# Altium PCB DB_PCB.PcbDoc
Units mm, origin at the board's own origin, x right, y up, seen from the top; angles counter-clockwise.
Board outline 90 x 75 mm, 4 copper layers (Top Layer, GND, POWER, Bottom Layer), stack 1.482 mm thick; 58 components, 32 nets, 166 pads, 54 vias.
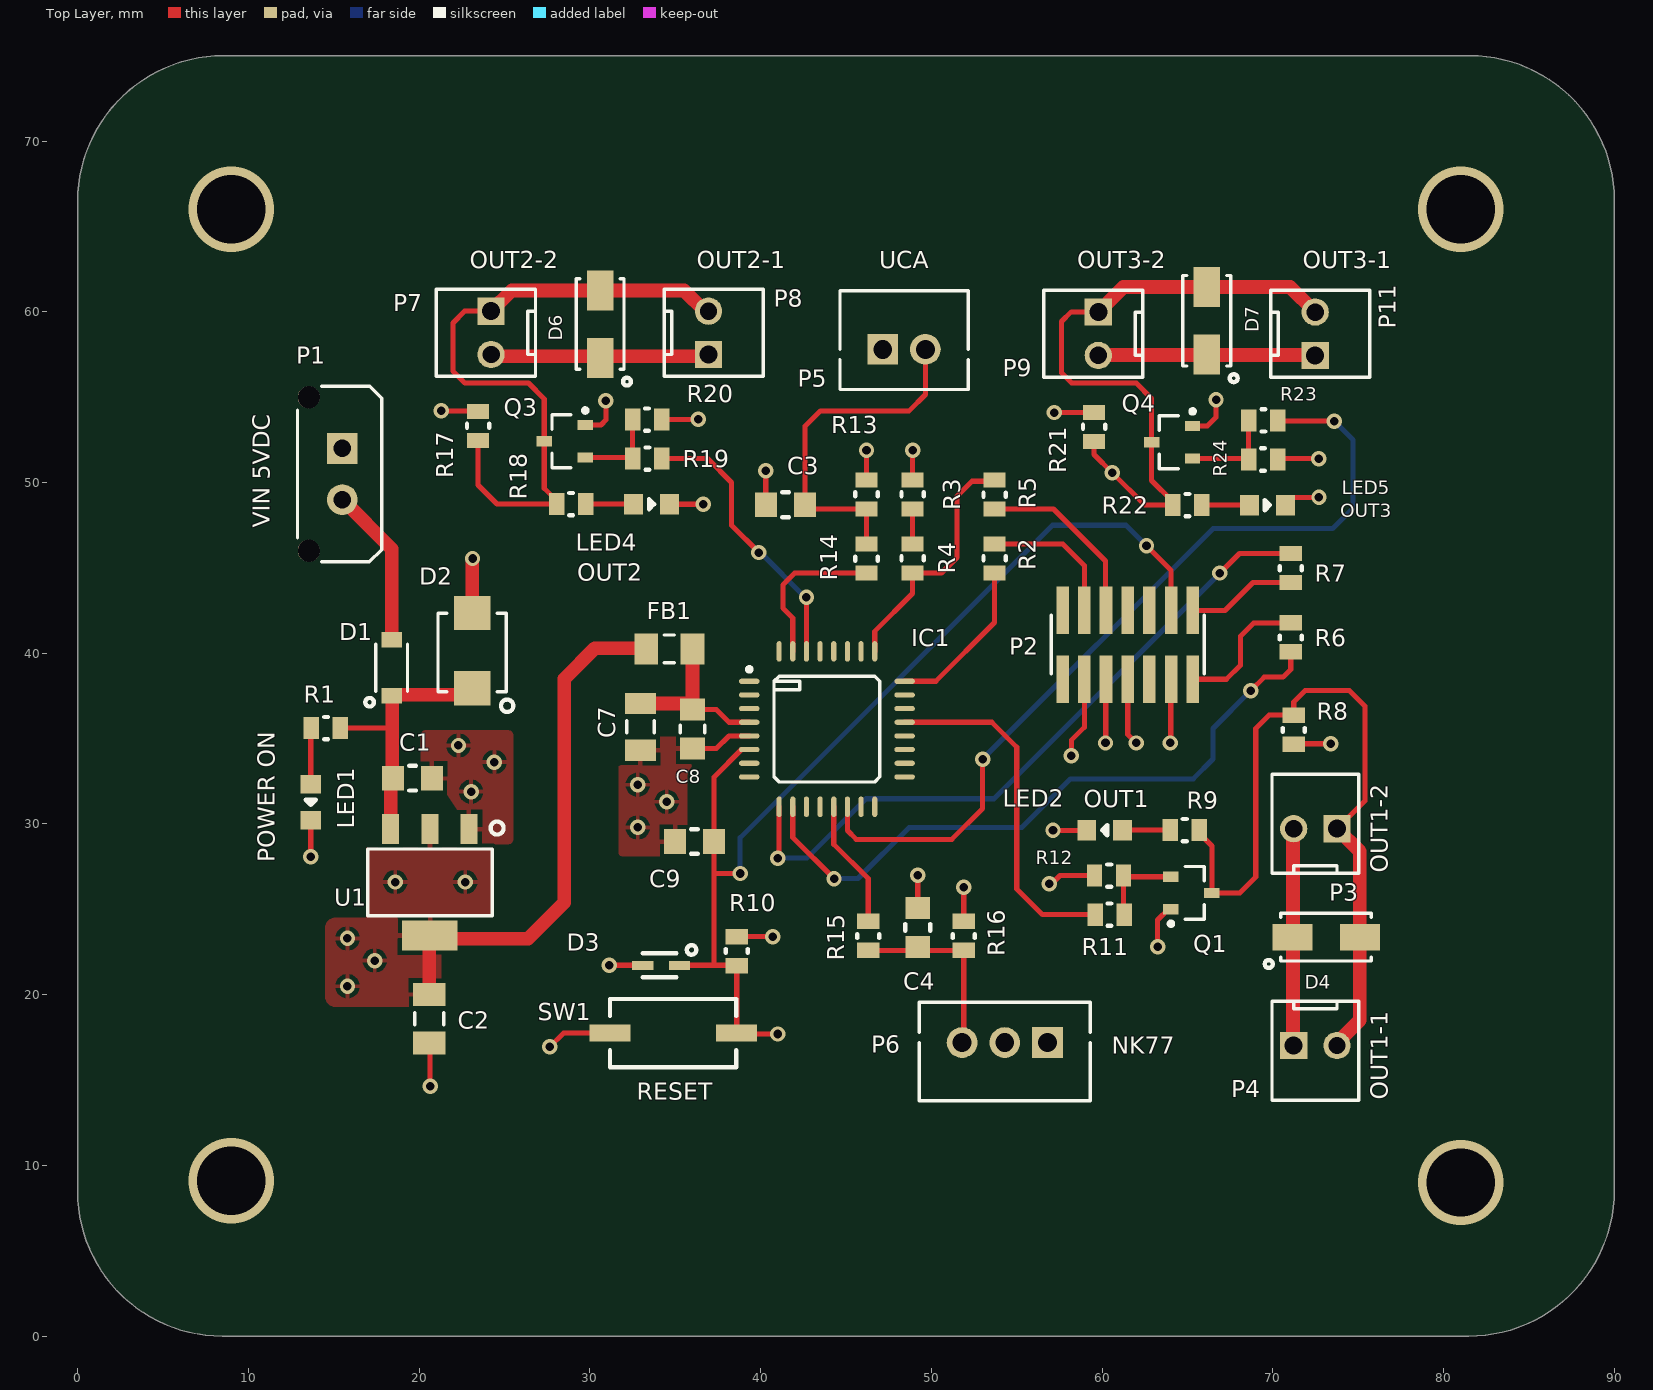
[diagram p0: Top Layer view]
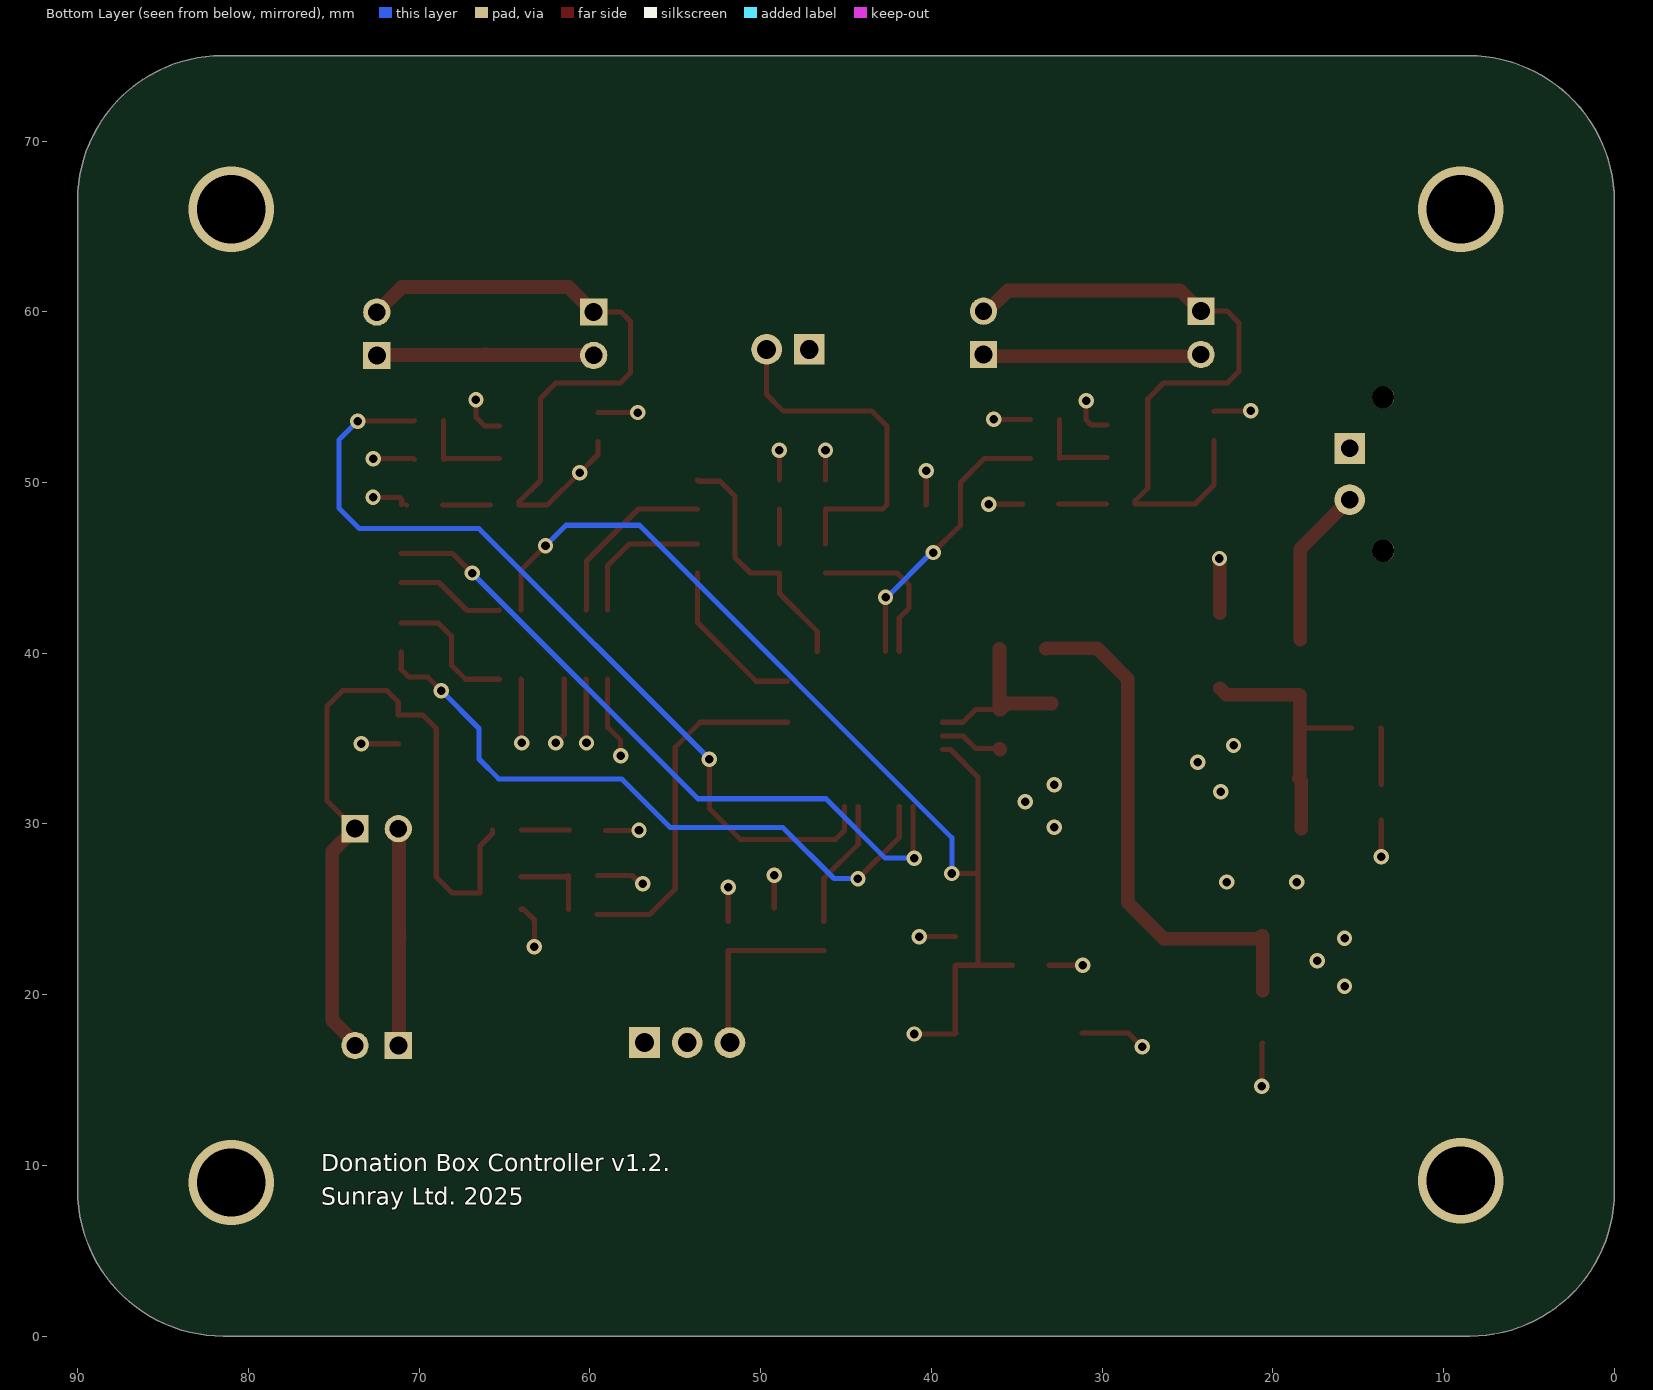
[diagram p1: Bottom Layer view, seen from below]
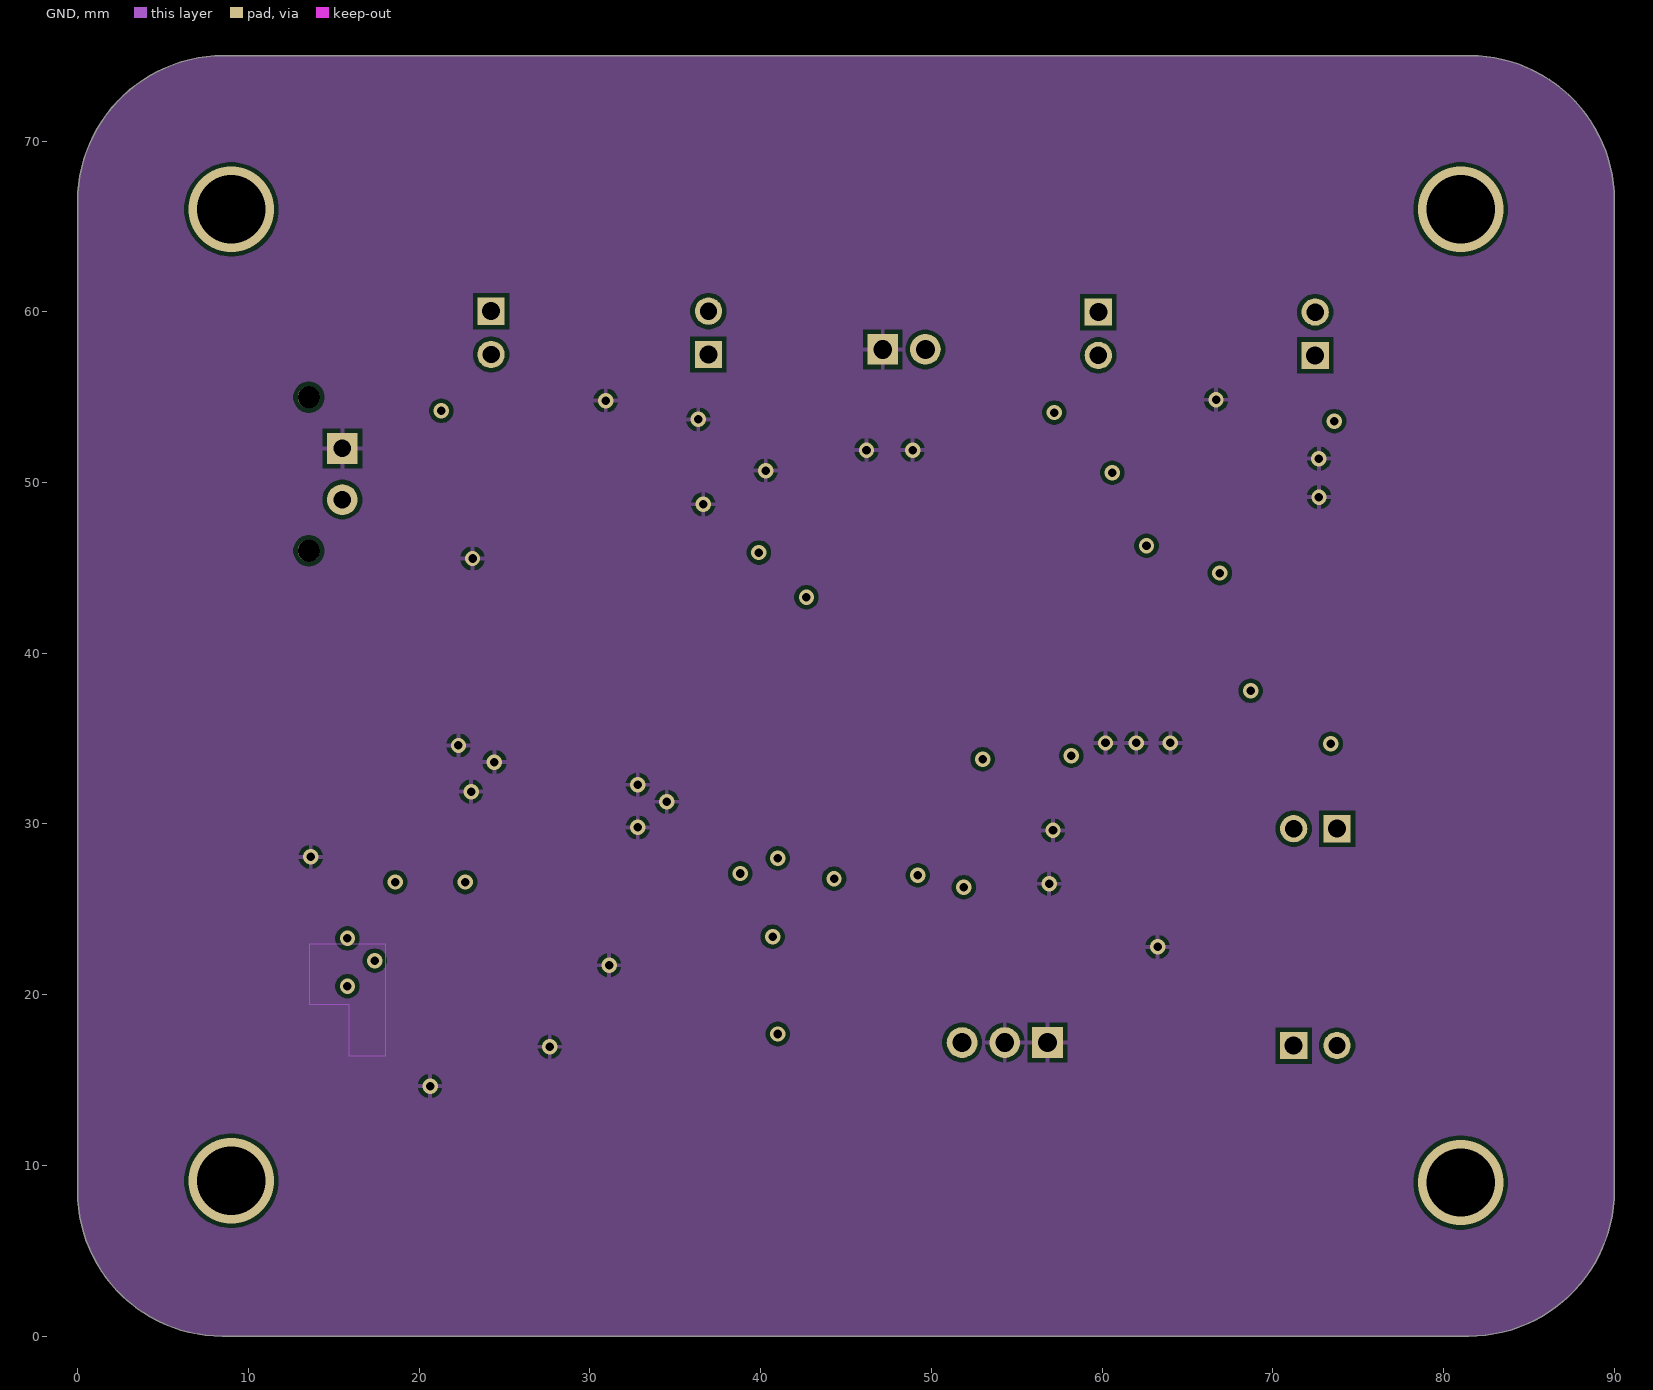
[diagram p2: GND]
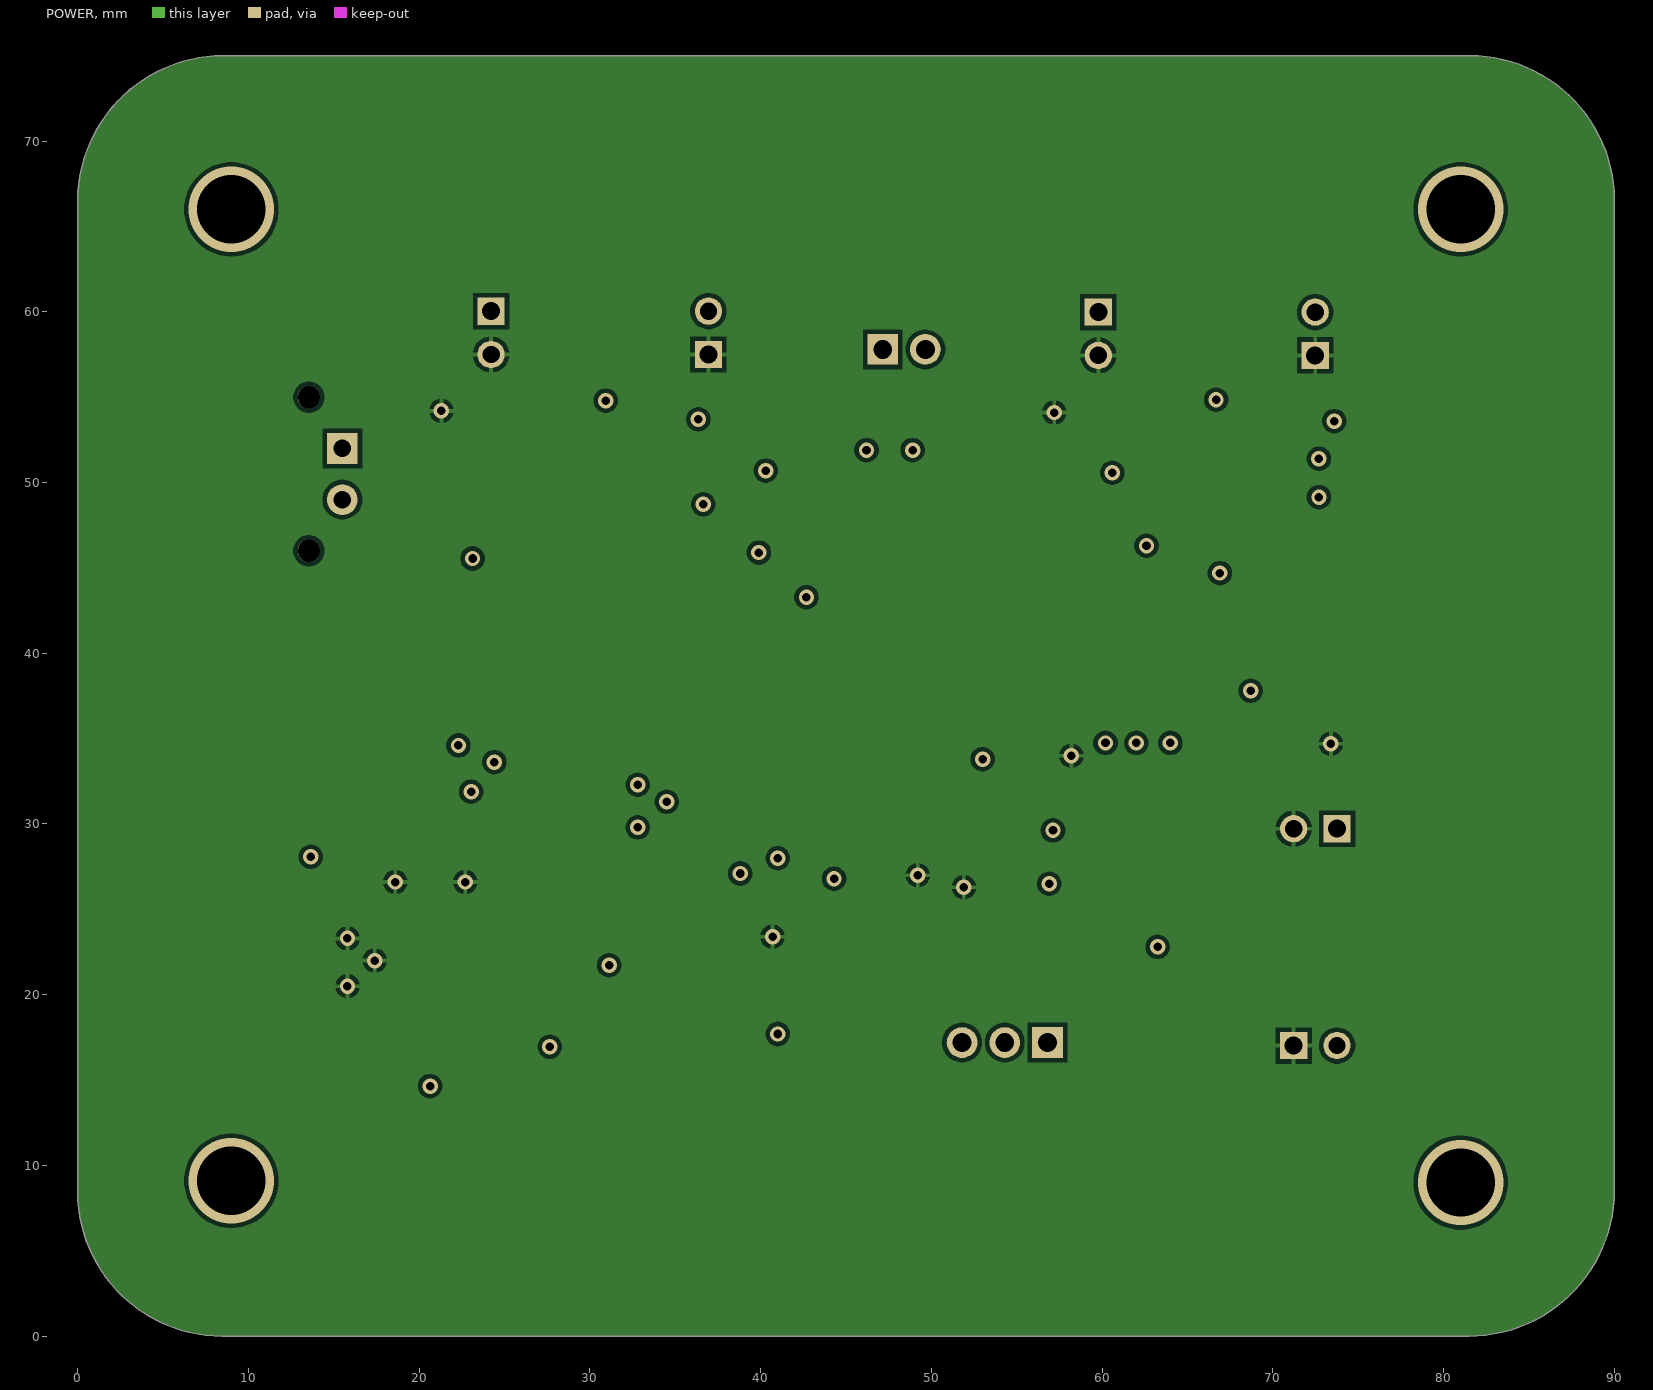
[diagram p3: POWER]

## Layer stack, top to bottom
Top Solder: solder mask 0.0102, Solder Resist, Dk 3.5
Top Layer: signal copper 0.035
Dielectric 2: prepreg 0.0711, PP-006, Dk 4.29
GND: signal copper 0.035
Dielectric 1: dielectric 1.2, FR-4, Dk 4.8
POWER: signal copper 0.035
Dielectric 3: prepreg 0.0711, PP-006, Dk 4.29
Bottom Layer: signal copper 0.035
Bottom Solder: solder mask 0.0102, Solder Resist, Dk 3.5

## Board outline
8.464,0 cw(c8.464,8.464) 0,8.464 0,66.464 cw(c8.536,66.464) 8.536,75 81.536,75 cw(c81.536,66.536) 90,66.536 90,8.536 cw(c81.464,8.536) 81.464,0

## Design rules (kind name [scope] priority, off if disabled: settings)
Clearance [All] p1: gap=0.254 ignorepadtopadclearanceinfootprint=FALSE except(0: Arc-Hole Track-Hole SMDPad-Hole THPad-Hole Via-Hole Fill-Hole Poly-Hole Region-Hole Text-Hole)
HoleSize [All] p1: absolutevalues=TRUE maxlimit=4 minlimit=0.025 maxpercent=80.000 minpercent=20.000
PolygonConnect [All] p1: connectstyle=Relief reliefconductorwidth=0.254 reliefentries=4 polygonreliefangle="90 Angle" airgapwidth=0.254
RoutingVias [All] p1: holewidth=0.5 width=0.9 viastyle="Through Hole" minholewidth=0.5 minwidth=0.9 maxholewidth=0.5 maxwidth=0.9
SilkToSolderMaskClearance [IsPad] p1: minsilkscreentomaskgap=0.1 clearancetoexposedcopper=TRUE
SolderMaskExpansion [All] p1: expansion=0.102 istentingtop=FALSE
Width [All] p1: maxlimit=0.8 minlimit=0.3 preferedwidth=0.4 minimp=50.000000 maximp=50.000000 favimp=50.000000
28 further rules are at their usual default settings.

## Classes and differential pairs
component class STlink-plug: P2 R2 R5 R6 R7
component class Out3: D7 LED5 P9 P11 Q4 R21 R22 R23 R24
component class Out2: D6 LED4 P7 P8 Q3 R17 R18 R19 R20
component class Out1: D4 LED2 P3 P4 Q1 R8 R9 R11 R12
component class Power: C1 C2 D1 D2 LED1 P1 R1 U1
component class MCU: C3 C4 C7 C8 C9 D3 FB1 IC1 P5 P6 R3 R4 R10 R13 R14 R15 R16 SW1

## Components (designator, comment, footprint, x,y, rotation, side; value= is the part's Value field where it differs from the comment)
C1 "100nF" SMT_CAP_0805(2012)_X5R-KYOCERA 19.611,32.683 r180 top
C2 "10uF" SMT_CAP_1206(3216)_MURATA 20.6,18.6 r90 top
C3 "10nF" SMT_CAP_0805(2012)_X5R-KYOCERA 41.457,48.7 r180 top
C4 "10nF" SMT_CAP_0805(2012)_X5R-KYOCERA 49.2,23.943 r90 top
C7 "4.7uF" SMT_CAP_1206(3216)_MLCC-KEMET 32.962,35.686 r90 top
C8 "100nF" SMT_CAP_0805(2012)_MLCC-KYOCERA 36.01,35.559 r270 top
C9 "100nF" SMT_CAP_0805(2012)_X5R-KYOCERA 36.125,28.975 r0 top
D1 "MBR0520" SMT_DIODE_SCH_SOD-123 18.393,39.155 r90 top
D2 "TVS" SMT_DIODE_TVS_SMB 23.1,40.05 r270 top
D3 "TVS" SMT_DIODE_TVS_SOD-323 34.175,21.725 r270 top
D4 "SS14" SMT_DIODE_SCHTKY_VISHAI 73.125,23.375 r180 top
D6 "SS14" SMT_DIODE_SCHTKY_VISHAI 30.595,59.278 r270 top
D7 "SS14" SMT_DIODE_SCHTKY_VISHAI 66.131,59.477 r270 top
FB1 "120Ω/3.5A" SMT_FERR_BEAD_MODEL_1206(3216)_MURATA 34.655,40.258 r0 top
IC1 "STM32G030K8T6" SMT_STM32G030K8T6_IC 43.884,35.559 r0 top
LED1 "YELLOW" SMT_LED_0805(2012)_WURTH 13.65,31.275 r270 top
LED2 "GREEN" SMT_LED_0805(2012)_WURTH 60.152,29.643 r180 top
LED4 "BLUE" SMT_LED_0805(2012)_WURTH 33.609,48.737 r0 top
LED5 "RED" SMT_LED_0805(2012)_WURTH 69.687,48.682 r0 top
P1 "POWER" THT_CON_WAFER_2P_LHE_C3004-WV02 15.5,50.5 r270 top
P2 "STLINK" SMT_CON_SAMTEC_FTSH-107-01-L-DV-K 61.5,40.5 r0 top
P3 "OUT1-2" THT_CON_WAFER_2P_NEL_2217S-02-WH2 72.49,29.725 r180 top
P4 "OUT1-1" THT_CON_WAFER_2P_NEL_2217S-02-WH2 72.49,17.025 r0 top
P5 "UCA" THT_CON_WAFER_2P_2317SJ-02-K0 48.4,57.8 r0 top
P6 "NK77" THT_CON_WAFER_3P_2317SJ-03-K0 54.3,17.2 r180 top
P7 "OUT2-2" THT_CON_WAFER_2P_NEL_2217S-02-WH2 24.211,58.77 r270 top
P8 "OUT2-1" THT_CON_WAFER_2P_NEL_2217S-02-WH2 36.945,58.77 r90 top
P9 "OUT3-2" THT_CON_WAFER_2P_NEL_2217S-02-WH2 59.781,58.715 r270 top
P11 "OUT3-1" THT_CON_WAFER_2P_NEL_2217S-02-WH2 72.481,58.715 r90 top
Q1 "SST2222AT116" SMT_TRANS_SST2222AT116_SOT23 65.232,25.96 r0 top
Q3 "SST2222AT116" SMT_TRANS_SST2222AT116_SOT23 28.529,52.42 r180 top
Q4 "SST2222AT116" SMT_TRANS_SST2222AT116_SOT23 64.099,52.365 r180 top
R1 "470" SMT_RES_0805(2012) 14.531,35.618 r180 top
R2 "47" SMT_RES_0805(2012) 53.7,45.55 r270 top
R3 "470" SMT_RES_0805(2012) 48.9,49.3 r270 top
R4 "0" SMT_RES_0805(2012) 48.9,45.55 r270 top
R5 "47" SMT_RES_0805(2012) 53.7,49.3 r90 top
R6 "47" SMT_RES_0805(2012) 71.048,40.93 r90 top
R7 "47" SMT_RES_0805(2012) 71.048,44.994 r90 top
R8 "10K" SMT_RES_0805(2012) 71.225,35.525 r90 top
R9 "470" SMT_RES_0805(2012) 64.851,29.643 r0 top
R10 "10K" SMT_RES_0805(2012) 38.6,22.55 r270 top
R11 "220" SMT_RES_0805(2012) 60.445,24.69 r0 top
R12 "10K" SMT_RES_0805(2012) 60.406,26.976 r180 top
R13 "5K" SMT_RES_0805(2012) 46.2,49.3 r270 top
R14 "470" SMT_RES_0805(2012) 46.2,45.55 r90 top
R15 "470" SMT_RES_0805(2012) 46.3,23.45 r90 top
R16 "5K" SMT_RES_0805(2012) 51.9,23.45 r90 top
R17 "10K" SMT_RES_0805(2012) 23.449,53.309 r270 top
R18 "470" SMT_RES_0805(2012) 28.91,48.737 r0 top
R19 "220" SMT_RES_0805(2012) 33.355,51.404 r180 top
R20 "10K" SMT_RES_0805(2012) 33.355,53.69 r0 top
R21 "10K" SMT_RES_0805(2012) 59.527,53.254 r270 top
R22 "470" SMT_RES_0805(2012) 64.988,48.682 r180 top
R23 "220" SMT_RES_0805(2012) 69.433,53.635 r180 top
R24 "10K" SMT_RES_0805(2012) 69.433,51.349 r0 top
SW1 "TS-A07GS" SMT_TSW-A07GS 31.175,17.75 r0 top
U1 "LD1117AS3" SMT_VR_LD1117AS3 20.627,26.587 r270 top

## Footprints (in the part's own frame and the unit in brackets; to place one, negate y for a bottom-side part, rotate by r counter-clockwise, add the part's x,y. Pads: shape width x height; smd on the part's side, far side on the other; paste and mask are expansions set on the pad)
SMT_CAP_0805(2012)_MLCC-KYOCERA [mm] "Multilayer Ceramic Capacitor MLCC 0805(2012) KYOCERA AVX 100nF 08055C104JAT2A 50VDC X7R"
  rect 1.3x1.45 smd: 1(-1.143,0) 2(1.143,0)
  silkscreen extent -0.23,-0.72 0.23,0.72, body extent -1.1,-0.72 1.1,0.72, height 1
SMT_CAP_0805(2012)_X5R-KYOCERA [mm] "Multilayer Ceramic Capacitor 0805(2012) KYOCERA AVX 100nF 08055D104KAT2A 50VDC X5R"
  rect 1.3x1.45 smd: 1(-1.143,0) 2(1.143,0)
  silkscreen extent -0.2,-0.72 0.2,0.72, body extent -1.1,-0.72 1.1,0.72, height 1.4
SMT_CAP_1206(3216)_MLCC-KEMET [mm] "Multilayer Ceramic Capacitor MLCC 1206(3216) KEMET(Yageo) 4.7uF C1206C475K5RACTU 50VDC X7R"
  rect 1.25x1.8 smd: 1(-1.375,0) 2(1.375,0)
  silkscreen extent -0.35,-0.8 0.35,0.8, body extent -1.6,-0.9 1.6,0.9, height 1.8
SMT_CAP_1206(3216)_MURATA [mm] "Ceramic Capacitor 1206(3216) MURATA 10uF 50VDC GCM31CD71H106KE36L X7T"
  rect 1.35x1.9 smd: 1(-1.425,0) 2(1.425,0)
  silkscreen extent -0.35,-0.85 0.35,0.85, body extent -1.75,-0.95 1.75,0.95, height 1.9
SMT_CON_SAMTEC_FTSH-107-01-L-DV-K [mm] "Connector 14-pin Samtec FTSH-107-01-L-DV-K 1.27mm Pitch SMT"
  rect 0.74x2.79 smd: 1(-3.8,-2.025) 2(-3.81,2.025) 3(-2.54,-2.025) 4(-2.54,2.025) 5(-1.27,-2.025) 6(-1.27,2.025) 7(0,-2.025) 8(0,2.025) 9(1.27,-2.025) 10(1.27,2.025) 11(2.54,-2.025) 12(2.54,2.025) 13(3.81,-2.025) 14(3.81,2.025)
  silkscreen extent -4.47,-1.72 4.47,1.72, body extent -4.45,-2.6 4.45,2.6, height 6.12
SMT_DIODE_SCH_SOD-123 [mm] "Schottky Diode If=500mA 20 V MBR0520L-TP SOD-123-2 by MCC"
  rect 0.9x1.2 smd: 1(1.635,0) 2(-1.635,0)
  silkscreen extent -2.27,-0.92 1.38,1.55, body extent -1.43,-0.9 1.42,0.9, height 1.35
SMT_DIODE_SCHTKY_VISHAI [mm] "SMT Diode Schottky Vishay DO-214AC SS14-M3/5AT IF=1A VR=40 V FV=0.5VG"
  rect 2.35x1.55 smd: 1(-1.975,0) 2(1.975,0)
  silkscreen extent -2.65,-1.4 3.6,1.81, body extent -2.64,-1.4 2.64,1.39, height 2.29
SMT_DIODE_TVS_SMB [mm] "Diode TVS Littelfuse 600W SZP6SMB6.8AT3G"
  rect 2x2.15 smd: 1(-2.3,0) 2(2.1,0)
  silkscreen extent -2.3,-2 3.49,2.42, body extent -2.3,-1.97 2.3,1.97, height 2.47
SMT_DIODE_TVS_SOD-323 [mm] "Diode TVS Semtech Vwr=3.3V Vcl=15.7 ESD=30kV Ip=36A RCLAMP03301H.C"
  rect 0.53x1.25 smd: 1(0,1.075) 2(0,-1.075)
  silkscreen extent -1.18,-1.07 0.7,2.06, body extent -0.7,-1.07 0.7,0.9, height 1
SMT_FERR_BEAD_MODEL_1206(3216)_MURATA [mm] "SMT MURATA Ferrite Bead MODEL 1206(3216) BLM31PG121SN1L *?/*mA"
  rect 1.39x1.82 smd: 1(-1.355,0) 2(1.355,0)
  silkscreen extent -0.3,-0.81 0.3,0.81, body extent -1.7,-0.9 1.7,0.9, height 1.3
SMT_LED_0805(2012)_WURTH [mm] "LED 0805(2012) 20mA 2V 150080YS75000 by Wurth Elektronik"
  rect 1.1x1.2 smd: 1(1.05,0) 2(-1.05,0)
  silkscreen extent -0.15,-0.3 0.15,0.3, body extent -1,-0.63 1,0.63, height 0.7
SMT_RES_0805(2012) [mm] "0805(2012) Resistor 1/4-1/8W 150V 2A"
  rect 0.9x1.3 smd: 1(-0.85,0) 2(0.85,0)
  silkscreen extent -0.13,-0.65 0.1,0.65, body extent -1.1,-0.65 1.1,0.65, height 0.55
SMT_STM32G030K8T6_IC [mm] "STM32G030K8T6 Cortex-M0+ Flash=64Kbytes RAM=8Kbyte LQFP-32"
  oval 1.2x0.3 smd: 1(-4.55,2.8) 2(-4.55,2) 3(-4.55,1.2) 4(-4.55,0.4) 5(-4.55,-0.4) 6(-4.55,-1.2) 7(-4.55,-2) 8(-4.55,-2.8) 17(4.55,-2.8) 18(4.55,-2) 19(4.55,-1.2) 20(4.55,-0.4) 21(4.55,0.4) 22(4.55,1.2) 23(4.55,2) 24(4.55,2.8)
  oval 0.3x1.2 smd: 9(-2.8,-4.55) 10(-2,-4.55) 11(-1.2,-4.55) 12(-0.4,-4.55) 13(0.4,-4.55) 14(1.2,-4.55) 15(2,-4.55) 16(2.8,-4.55) 25(2.8,4.55) 26(2,4.55) 27(1.2,4.55) 28(0.4,4.55) 29(-0.4,4.55) 30(-1.2,4.55) 31(-2,4.55) 32(-2.8,4.55)
  silkscreen extent -4.67,-3.1 3.1,3.62, body extent -3.5,-3.5 3.5,3.5, height 1.6
SMT_TRANS_SST2222AT116_SOT23 [mm] "Transistor NPN SST2222AT116 SOT23 700mA 40V"
  rect 0.9x0.6 smd: 1(-1.2,-0.95) 2(-1.2,0.95) 3(1.2,0)
  silkscreen extent -1.32,-1.92 0.75,1.55, body extent -0.75,-1.55 0.75,1.55, height 1.2
SMT_TSW-A07GS [mm] "Tactile Switch TS-A07GS 50mA 12V"
  rect 2.4x1 smd: 1(0,0) 2(7.4,0)
  silkscreen extent 0,-2 7.4,2, body extent 0.7,-1.6 6.7,1.6, height 2.5
SMT_VR_LD1117AS3 [mm] "Voltage Regulator ST LD1117AS33TR 1A 3.3V 10Vmax"
  rect 1.75x1 smd: 1(-3.125,2.3) 2(-3.125,0) 3(-3.125,-2.3)
  rect 1.75x3.25 smd: 4(3.125,0)
  silkscreen extent -3.56,-3.65 1.95,4.32, body extent -1.85,-3.65 1.85,3.65, height 1.8
THT_CON_WAFER_2P_2317SJ-02-K0 [mm] "Connector Wafer 2-Pins Pitch-2.5mm Straight_Pins NELTRON 2317SJ-02-K0"
  rect 1.8x1.8 hole 1.1: 1(-1.25,0)
  round 1.8 hole 1.1: 2(1.25,0)
  silkscreen extent -3.75,-2.35 3.75,3.43, body extent -3.8,-2.35 3.75,3.4, height 6.5
THT_CON_WAFER_2P_LHE_C3004-WV02 [mm] "Connector Wafer LHE 2-Pin Pitch-3.00mm 250V/5A C3004-WV02"
  rect 1.8x1.8 hole 1.02: 1(-1.5,0)
  round 1.8 hole 1.02: 2(1.5,0)
  round 1.3 hole 1.3: ""(-4.5,-1.96) ""(4.5,-1.96)
  silkscreen extent -5.15,-2.63 5.15,2.3, body extent -5.15,-2.6 5.15,3.1, height 10
THT_CON_WAFER_2P_NEL_2217S-02-WH2 [mm] "Connector Wafer NELTRON 2-Pins Pitch-2.54mm 250V/3A 2217S-02-WH2"
  rect 1.6x1.6 hole 1.05: 1(-1.27,0)
  round 1.6 hole 1.02: 2(1.27,0)
  silkscreen extent -2.54,-3.2 2.54,2.6, body extent -2.54,-3.2 2.54,2.6, height 11.5
THT_CON_WAFER_3P_2317SJ-03-K0 [mm] "Connector Wafer 3-Pins Pitch-2.5mm Straight_Pins NELTRON 2317SJ-03-K0"
  rect 1.8x1.8 hole 1.1: 1(-2.5,0)
  round 1.8 hole 1.1: 2(0,0) 3(2.5,0)
  silkscreen extent -5,-2.35 5,3.4, body extent -5,-2.35 5,3.4, height 6.5

## Part data
C1 C3 C4 C9: library part SMT_CAP_0805(2012)_X5R-KYOCERA, "Multilayer Ceramic Capacitor 0805(2012) KYOCERA AVX 100nF 08055D104KAT2A 50VDC X5R"
C2: library part SMT_CAP_1206(3216)_MURATA, "Ceramic Capacitor 1206(3216) MURATA 10uF 50VDC GCM31CD71H106KE36L X7T"
C7: library part SMT_CAP_1206(3216)_MLCC-KEMET, "Multilayer Ceramic Capacitor MLCC 1206(3216) KEMET(Yageo) 4.7uF C1206C475K5RACTU 50VDC X7R"
C8: library part SMT_CAP_0805(2012)_MLCC-KYOCERA, "Multilayer Ceramic Capacitor MLCC 1206(3216) KYOCERA AVX 100nF 08055C104JAT2A 50VDC X7R"
D1: library part SMT_DIODE_SCH_SOD-123, "Schottky Diode If=500mA 20 V MBR0520L-TP SOD-123-2 by MCC"
D2: library part SMT_DIODE_TVS_SMB, "Diode TVS Littelfuse 600W SZP6SMB6.8AT3G"
D3: library part SMT_DIODE_TVS_SOD-323, "Diode TVS Semtech Vwr=3.3V Vcl=15.7 ESD=30kV Ip=36A RCLAMP03301H.C"
D4 D6 D7: library part SMT_DIODE_SCHTKY_VISHAI, "SMT Diode Schottky Vishay DO-214AC SS14-M3/5AT IF=1A VR=40 V FV=0.5VG"
FB1: library part SMT_FERR_BEAD_MODEL_1206(3216)_MURATA, "SMT MURATA Ferrite Bead MODEL 1206(3216) BLM31PG121SN1L *Ω/*mA"
IC1: library part SMT_STM32G030K8T6_IC, "STM32G030K8T6 Cortex-M0+ Flash=64Kbytes RAM=8Kbyte LQFP-32"
LED1 LED2 LED4 LED5: library part SMT_LED_0805(2012)_WURTH, "LED 0805(2012) 20mA 2V 150080YS75000 by Wurth Elektronik"
P1: library part THT_CON_WAFER_2P_LHE_C3004-WV02, "Connector Wafer LHE 2-Pin Pitch-3.00mm 250V/5A C3004-WV02"
P2: library part SMT_CON_SAMTEC_FTSH-107-01-L-DV-K, "Connector 14-pin Samtec FTSH-107-01-L-DV-K 1.27mm Pitch SMT"
P3 P4 P7 P8 P9 P11: library part THT_CON_WAFER_2P_NEL_2217S-02-WH2, "Connector Wafer NELTRON 2-Pins Pitch-2.54mm 250V/3A 2217S-02-WH2"
P5: library part THT_CON_WAFER_2P_2317SJ-02-K0, "Connector Wafer 2-Pins Pitch-2.5mm Straight_Pins NELTRON 2317SJ-02-K0"
P6: library part THT_CON_WAFER_3P_2317SJ-03-K0, "Connector Wafer 3-Pins Pitch-2.5mm Straight_Pins NELTRON 2317SJ-03-K0"
Q1 Q3 Q4: library part SMT_TRANS_SST2222AT116_SOT23, "Transistor NPN SST2222AT116 SOT23 700mA 40V"
R1 R2 R3 R4 R5 R6 R7 R8 R9 R10 R11 R12 R13 R14 R15 R16 R17 R18 R19 R20 R21 R22 R23 R24: library part SMT_RES_0805(2012), "0805(2012) Resistor 1/4-1/8W 150V 2A"
SW1: library part SMT_TSW-A07GS, "Tactile Switch TS-A07GS 50mA 12V"
U1: library part SMT_VR_LD1117AS3, "Voltage Regulator ST LD1117AS33TR 1A 3.3V 10Vmax"

## Via types
v1: diameter 0.9, hole 0.5, Top Layer to Bottom Layer, 50 vias
v2: diameter 5, hole 4, Top Layer to Bottom Layer, 4 vias

## Nets (pads, with @x,y where several pads share a name; then routed paths per layer and width w, separated by ;. In a path a pad name is that pad's centre, name@x,y a point inside that pad or via, vN(x,y) a via of type N, cw(c..) or ccw(c..) an arc to the next point about the centre after c; other vN are vias at no path point)
+3.3: C2.2 C4.2 D4.2 D6.2 D7.2 FB1.1 P2.3 P3.2 P4.1 P7.2 P8.1 P9.2 P11.1 R8.1 R10.1 R16.2 R17.1 R21.1 U1.2 U1.4 | length 86.8
  Top Layer w0.3: v1@18.5,26.7 v1(18.6,26.6) ; v1(21.3,54.2) 23.408,54.2 R17.1 ; R10.1 v1(40.7,23.4) ; C4.2 v1(49.2,27) ; R16.2 v1(51.9,26.3) ; v1(57.2,54.1) 59.523,54.1 R21.1 ; v1(58.2,34) 58.2,34.908 58.96,35.668 P2.3 ; R8.1 71.25,34.7 v1(73.4,34.7)
  Top Layer w0.8: C2.2@20.599,20.237 20.599,23.434 U1.4 20.814,23.275 26.375,23.275 28.5,25.4 28.5,38.5 30.3,40.3 33.258,40.3 FB1.1 ; P7.2 24.309,57.402 36.846,57.402 P8.1 ; P9.2@59.654,57.318 P9.2 59.809,57.474 66.102,57.474 D7.2 66.16,57.474 72.453,57.474 P11.1 ; P4.1@71.185,17.06 71.185,23.34 D4.2 71.185,23.41 71.185,29.69 P3.2 P3.2@71.223,29.728
  other v1: 15.8,20.5 17.4,22 15.8,23.3 22.7,26.6
GND: C1.1 C2.1 C3.2 C7.1 C8.2 C9.1 D2.1 D3.2 IC1.5 LED1.1 LED2.1 LED4.1 LED5.1 P1.1 P2.5 P2.7 P2.11 P5.1 P6.1 P6.2 Q1.1 Q3.1 Q4.1 R3.1 R12.2 R13.1 R20.2 R24.2 SW1.1 U1.1 | length 55.5
  Top Layer w0.3: v1(13.65,28.075) LED1.1 ; C2.1 20.638,17.137 v1(20.638,14.649) ; v1(27.65,16.95) 28.45,17.75 SW1.1 ; Q3.1 30.645,53.37 30.95,53.675 30.95,54.775 v1(30.925,54.8) ; v1(31.125,21.725) D3.2 ; R20.2 34.215,53.7 v1(36.35,53.7) ; LED4.1 34.671,48.725 v1(36.636,48.725) ; C8.2 37.407,34.416 38.15,35.159 IC1.5 ; v1(40.3,50.7) 40.3,48.714 C3.2 ; R13.1 v1(46.2,51.9) ; R3.1 v1(48.9,51.9) ; v1(56.9,26.5) 57.062,26.5 57.538,26.976 R12.2 ; v1(57.125,29.625) LED2.1@59.084,29.625 ; v1(60.2,34.746) 60.215,34.761 60.215,38.46 P2.5 ; P2.7 61.5,35.246 v1(62,34.746) ; v1(63.25,22.8) 63.25,24.378 63.882,25.01 Q1.1 ; v1(64,34.746) 64.02,34.766 64.02,38.455 P2.11 ; Q4.1 66.165,53.315 66.675,53.825 v1(66.675,54.85) ; R24.2 70.334,51.4 v1(72.7,51.4) ; LED5.1 LED5.1@70.744,48.675 ; LED5.1@71.019,48.725 71.019,49.014 71.137,49.132 72.688,49.132 v1(72.703,49.147)
  Top Layer w0.8: D2.1 23.113,42.363 23.113,45.538 v1(23.125,45.55) ; C8.2@35.957,34.364 C8.2
  other v1: 32.8,29.8 34.5,31.3 23.042,31.895 32.8,32.3 24.406,33.626 22.3,34.6
NetC1_2: C1.2 D1.2 D2.2 R1.1 U1.3 | length 15.9
  Top Layer w0.3: R1.1 18.413,35.618 18.431,35.6
  Top Layer w0.8: U1.3 18.327,32.542 C1.2 18.431,32.721 18.431,35.6 18.431,37.526 D1.2@18.414,37.542 ; D1.2 D1.2@18.414,37.542 ; D2.2 22.72,37.57 18.443,37.57 D1.2@18.414,37.542
NetC3_1: C3.1 P5.2 R13.2 R14.2 | length 20.8
  Top Layer w0.3: R14.2 R13.2 42.85,48.45 C3.1 42.6,53.3 43.5,54.2 48.7,54.2 49.65,55.15 P5.2
NetC4_1: C4.1 P6.3 R15.1 R16.1 | length 11
  Top Layer w0.3: R15.1 49.2,22.6 R16.1 51.9,17.3 P6.3
NetC7_2: C7.2 C8.1 FB1.2 IC1.4 | length 10.4
  Top Layer w0.3: C8.1 37.407,36.702 38.15,35.959 IC1.4
  Top Layer w0.8: C7.2 35.576,37.061 C8.1@35.935,36.702 ; C8.1 C8.1@35.935,36.702 ; FB1.2 36.01,36.777 C8.1@35.935,36.702
NetC9_2: C9.2 D3.1 IC1.6 P2.12 R10.2 SW1.2 | length 63.4
  Top Layer w0.3: D3.1 37.3,21.725 ; R10.2 R10.2@38.6,21.65 ; v1(38.8,27.1) 37.268,27.1 ; IC1.6 38.884,34.359 37.268,32.743 C9.2 37.268,27.1 ; v1(41,17.7) 38.625,17.7 SW1.2 38.6,17.775 R10.2@38.6,21.65 ; v1(62.6,46.3) 64.04,44.86 P2.12 ; 37.268,27.1 37.268,21.757 37.3,21.725 ; 37.3,21.725 38.525,21.725 R10.2@38.6,21.65
  Bottom Layer w0.3: v1(38.8,27.1) 38.8,29.2 57.1,47.5 61.4,47.5 v1(62.6,46.3)
NetD1_1: D1.1 P1.2 | length 9.4
  Top Layer w0.8: P1.2 18.393,46.107 D1.1
NetD4_1: D4.1 P3.1 P4.2 Q1.3 R8.2 R9.2 | length 45.5
  Top Layer w0.3: R9.2 65.701,29.443 66.432,28.712 Q1.3 68.06,25.96 69,26.9 69,35.6 69.775,36.375 R8.2 71.225,37.15 71.9,37.825 74.475,37.825 75.4,36.9 75.4,31.365 P3.1 P3.1@73.75,29.735
  Top Layer w0.8: P4.2 73.76,17.173 75.1,18.513 D4.1 75.1,28.385 P3.1
NetD6_1: D6.1 P7.1 P8.2 Q3.3 R17.2 R18.1 | length 39.3
  Top Layer w0.3: R17.2 R17.2 23.45,49.85 24.563,48.737 R18.1 28.06,48.937 27.329,49.668 Q3.3 27.329,54.896 26.4,55.825 22.675,55.825 21.975,56.525 21.975,59.35 22.665,60.04 P7.1
  Top Layer w0.8: P7.1 25.424,61.253 D6.1 35.516,61.253 36.729,60.04 P8.2
NetD7_1: D7.1 P9.1 P11.2 Q4.3 R21.2 R22.2 | length 38.6
  Top Layer w0.3: R21.2 59.527,51.648 v1(60.6,50.575) 62.493,48.682 R22.2 64.138,48.882 62.899,50.121 Q4.3 62.899,54.926 62,55.825 58.225,55.825 57.625,56.425 57.625,59.425 58.2,60 59.766,60 P9.1
  Top Layer w0.8: P9.1 61.248,61.452 D7.1 71.014,61.452 P11.2
NetIC1_9: IC1.9 R7.2 | length 40.5
  Top Layer w0.3: v1(41,28) 41.084,28.084 IC1.9 ; v1(66.9,44.7) 68.044,45.844 R7.2
  Bottom Layer w0.3: v1(41,28) 42.7,28 46.177,31.477 53.677,31.477 v1(66.9,44.7)
NetIC1_10: IC1.10 R6.1 | length 39.1
  Top Layer w0.3: IC1.10 41.884,29.216 v1(44.3,26.8) ; v1(68.7,37.8) 69.5,38.6 70.6,38.6 71.048,39.048 R6.1
  Bottom Layer w0.3: v1(44.3,26.8) 45.7,26.8 48.7,29.8 55.3,29.8 58.146,32.646 65.346,32.646 66.5,33.8 66.5,35.6 v1(68.7,37.8)
NetIC1_13: IC1.13 R15.2 | length 7.5
  Top Layer w0.3: IC1.13 44.284,28.816 46.3,26.8 R15.2
NetIC1_14: IC1.14 R23.1 | length 49.8
  Top Layer w0.3: IC1.14 45.084,29.616 45.6,29.1 51.2,29.1 53,30.9 v1(53,33.8) ; R23.1 70.318,53.6 v1(73.6,53.6)
  Bottom Layer w0.3: v1(53,33.8) 66.5,47.3 73.5,47.3 74.7,48.5 74.7,52.5 v1(73.6,53.6)
NetIC1_21: IC1.21 R11.1 | length 20.7
  Top Layer w0.3: IC1.21 53.541,35.959 55,34.5 55,26.2 56.5,24.7 59.585,24.7 R11.1
NetIC1_24: IC1.24 R2.2 | length 9.6
  Top Layer w0.3: IC1.24 50.259,38.359 53.7,41.8 R2.2
NetIC1_25: IC1.25 R4.2 R5.2 | length 14.7
  Top Layer w0.3: IC1.25 46.684,41.284 48.9,43.5 R4.2 50.6,44.7 51.5,45.6 51.5,49.2 52.376,50.076 53.626,50.076 R5.2
NetIC1_30: IC1.30 R19.1 | length 16.5
  Top Layer w0.3: R19.1 36.896,51.404 38.3,50 38.3,47.5 v1(39.9,45.9) ; IC1.30 42.684,42.924 42.685,42.925 v1(42.685,43.285)
  Bottom Layer w0.3: v1(39.9,45.9) 39.985,45.9 42.6,43.285 v1(42.685,43.285)
NetIC1_31: IC1.31 R14.1 | length 9.3
  Top Layer w0.3: IC1.31 41.884,42.073 41.3,42.657 41.3,44 42,44.7 R14.1
NetLED1_2: LED1.2 R1.2 | length 3.3
  Top Layer w0.3: LED1.2 13.65,35.587 R1.2
NetLED2_2: LED2.2 R9.1 | length 2.8
  Top Layer w0.3: LED2.2 R9.1
NetLED4_2: LED4.2 R18.2 | length 2.8
  Top Layer w0.3: R18.2 LED4.2
NetLED5_2: LED5.2 R22.1 | length 2.8
  Top Layer w0.3: R22.1 LED5.2
NetP2_4: P2.4 R2.1 | length 8.4
  Top Layer w0.3: R2.1 57.7,46.4 58.96,45.14 P2.4
NetP2_6: P2.6 R5.1 | length 10.7
  Top Layer w0.3: R5.1 57.15,48.45 60.2,45.4 60.2,42.555 P2.6
NetP2_13: P2.13 R6.2 | length 8.1
  Top Layer w0.3: P2.13 67.275,38.475 68.1,39.3 68.1,41 68.88,41.78 R6.2
NetP2_14: P2.14 R7.1 | length 6.4
  Top Layer w0.3: P2.14 65.335,42.5 67.2,42.5 68.844,44.144 R7.1
NetQ1_2: Q1.2 R11.2 R12.1 | length 4.7
  Top Layer w0.3: R11.2@61.256,24.983 R12.1 ; R12.1@61.322,26.91 Q1.2
NetQ3_2: Q3.2 R19.2 R20.1 | length 5.1
  Top Layer w0.3: Q3.2 32.439,51.47 R19.2 R20.1
NetQ4_2: Q4.2 R23.2 R24.1 | length 5.6
  Top Layer w0.3: Q4.2 68.517,51.415 R24.1 R23.2
NetR3_2: R3.2 R4.1 | length 2.1
  Top Layer w0.3: R4.1 R3.2
pads on no net: IC1.1 IC1.2 IC1.3 IC1.7 IC1.8 IC1.11 IC1.12 IC1.15 IC1.16 IC1.17 IC1.18 IC1.19 IC1.20 IC1.22 IC1.23 IC1.26 IC1.27 IC1.28 IC1.29 IC1.32 P1. P2.1 P2.2 P2.8 P2.9 P2.10
copper on no net:
  other v2: 81,9 9,9.1 9,66 81,66

## Polygon pours and split planes (outlines as drawn)
GND on GND "NONET_L-01_P-001" (solid, remove dead copper, pour order 28): 0,66.464 cw(c8.536,66.464) 8.536,75 81.536,75 cw(c81.536,66.536) 90,66.536 90,8.536 cw(c81.465,8.535) 81.464,0 8.464,0 cw(c8.464,8.464) 0,8.464
GND on GND "NONET_L-01_P-001" (solid, remove dead copper, pour order 12): 15.9,16.4 15.9,19.4 13.6,19.4 13.6,23 18,23 18,16.4
GND on Top Layer "NONET_L-01_P-001" (solid, remove dead copper, pour order 24): 36.7,35.1 31.8,35.1 ccw(c31.8,35) 31.7,35 31.7,28.3 ccw(c31.9,28.3) 31.9,28.1 35.7,28.1 35.7,32.7 cw(c36.7,32.7) 36.7,33.7
+3.3 on Top Layer "NONET_L-01_P-001" (solid, remove dead copper, pour order 11): 21.3,19.3 15.1,19.3 cw(c15.1,19.9) 14.5,19.9 14.5,23.898 cw(c15.109,23.898) 15.102,24.507 23,24.6 23,22.5 21.3,22.5
+3.3 on Top Layer "NONET_L-01_P-001" (solid, remove dead copper, pour order 19): 16.9,28.6 20.1,28.6 20.1,30.6 21.2,30.6 21.2,28.6 24.3,28.6 24.3,24.6 22.3,24.6 22.3,23.3 16.9,23.3
GND on Top Layer "NONET_L-01_P-001" (solid, remove dead copper, pour order 22): 25.2,35.5 20.4,35.5 ccw(c20.4,35.2) 20.1,35.2 20.1,32 21.465,32 22.4,30.6 22.4,28.8 25.2,28.8 ccw(c25.2,29.1) 25.5,29.1 25.5,35.2 ccw(c25.2,35.2)
+3.3 on POWER "NONET_L-01_P-001" (solid, remove dead copper, pour order 29): 0,66.464 cw(c8.536,66.464) 8.536,75 81.536,75 cw(c81.536,66.536) 90,66.536 90,8.536 cw(c81.465,8.535) 81.464,0 8.464,0 cw(c8.464,8.464) 0,8.464

## Silkscreen, mask and mechanical layers (free items; w line width, h text height)
Top Overlay:
  text "OUT2-2" at 22.954,62.554 h1
  text "OUT2-1" at 36.254,62.554 h1
  text "UCA" at 46.954,62.554 h1
  text "OUT3-2" at 58.554,62.554 h1
  text "OUT3-1" at 71.754,62.554 h1
  text "OUT3" at 73.954,47.954 h0.8
  text "VIN 5VDC" at 11.246,47.354 h1 r90
  text "OUT2" at 29.254,44.254 h1
  text "OUT1" at 58.926,30.994 h1
  text "POWER ON" at 11.546,27.754 h1 r90
  text "OUT1-2" at 76.746,27.154 h1 r90
  text "NK77" at 60.554,16.554 h1
  text "RESET" at 32.754,13.854 h1
  text "OUT1-1" at 76.746,13.854 h1 r90
Bottom Overlay:
  text "Donation Box Controller v1.2." at 75.746,9.654 h1
  text "Sunray Ltd. 2025" at 75.746,7.687 h1
Mechanical 1:
  lines w0.2: 0,8.464 ccw(c8.464,8.464) 8.464,0 81,0 81.464,0 ccw(c81.464,8.536) 90,8.536 90,66.536 ccw(c81.536,66.536) 81.536,75 9,75 8.536,75 ccw(c8.536,66.464) 0,66.464 0,8.464